# EAGLE board Project_v17a (EAGLE 5.06)
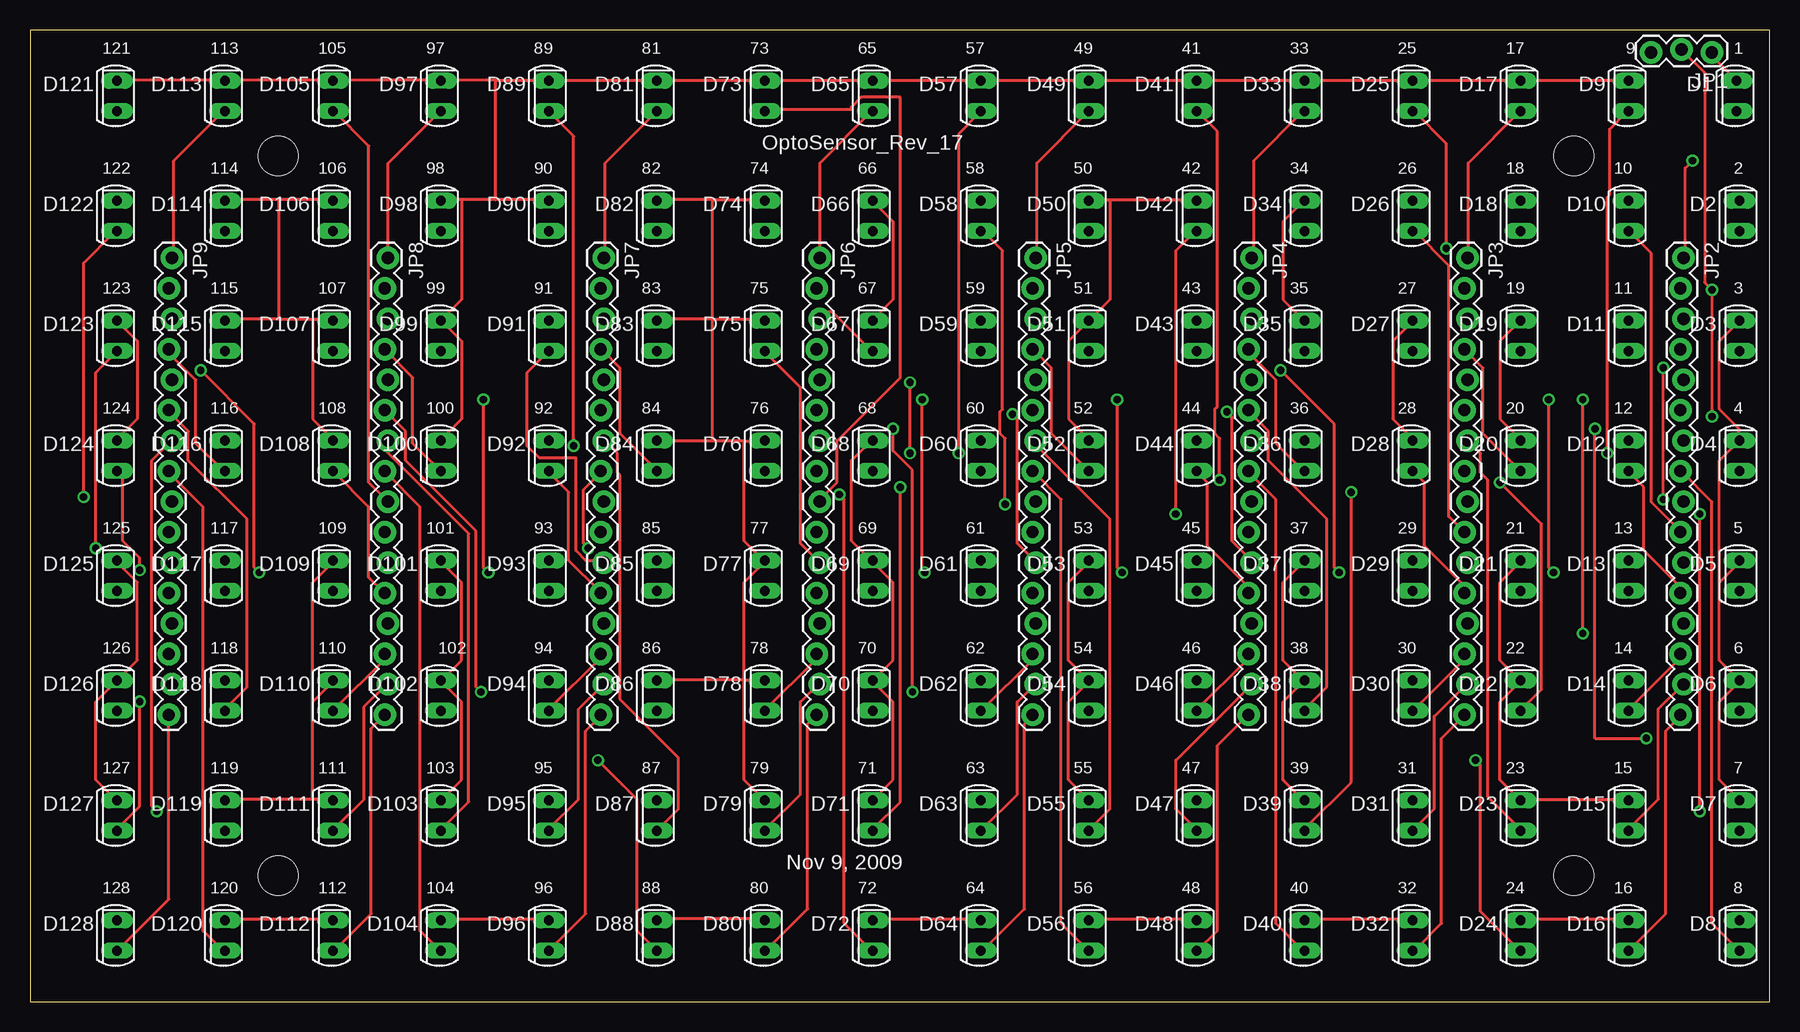
[diagram p0: board, top side]
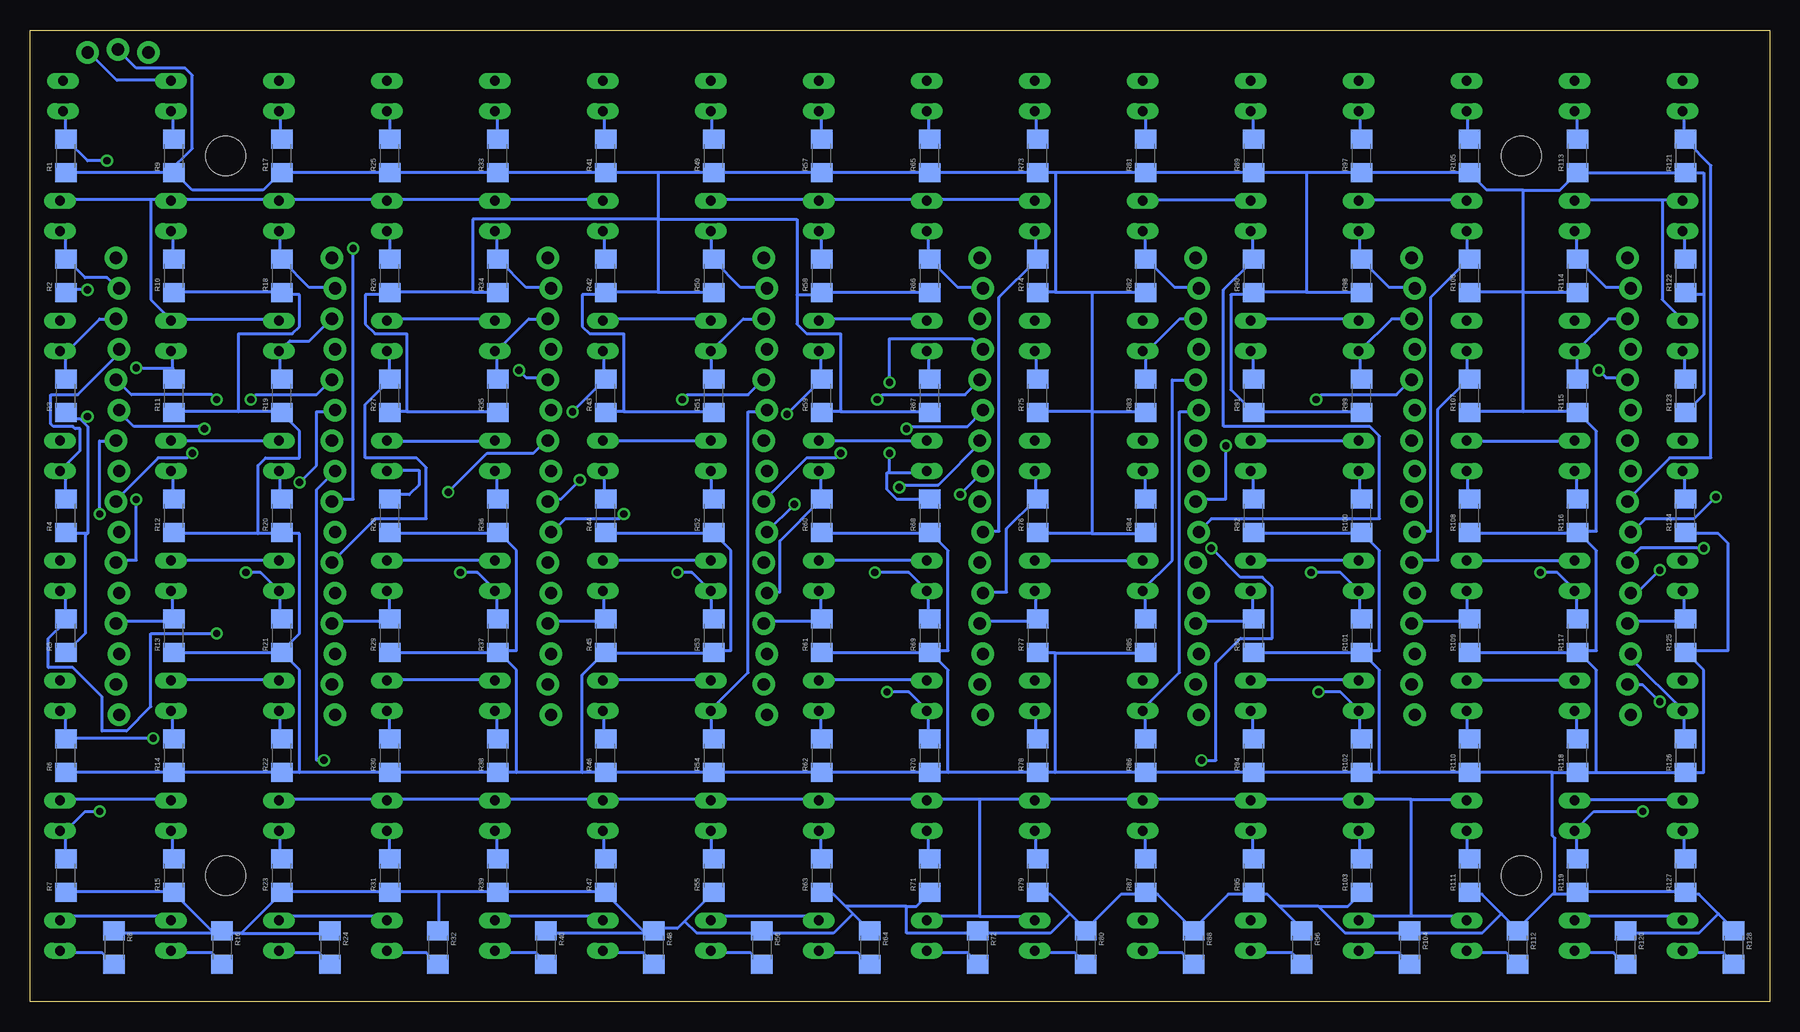
[diagram p1: board, bottom side, seen from below]

Size 145 x 81 mm. Coordinates in mm from the lower left corner, seen from the top.
Outline: 0,0 145,0 145,81 0,81 0,0
Copper layers (1*16): Top 0.035mm / dielectric 1.5mm / Bottom 0.035mm
Design rules "default": minimum track width 10mil, minimum drill 24mil, track to track 8mil, track to pad 8mil, pad to pad 8mil, via to via 8mil, smd to smd 8mil, copper to edge 40mil, drill to drill 8mil, minimum pad ring 10mil, minimum via ring 8mil, stop-mask expansion 4mil, vias tented up to drill 0mil, thermal gap 10mil

## Footprints (pad centres in the part's own frame; a part is rotated, then mirrored left to right if it is on the bottom)
SFH225 = drill 0.813 long: A 0,1.27; K 0,-1.27
1X03_LOCK = drill 1.016 pad 1.88 round: 1 0,0.127; 2 2.54,-0.127; 3 5.08,0.127
1X16_LOCK = drill 1.016 pad 1.88 round: 1 0,0.127; 2 2.54,-0.127; 3 5.08,0.127; 4 7.62,-0.127; 5 10.16,0.127; 6 12.7,-0.127; 7 15.24,0.127; 8 17.78,-0.127; 9 20.32,0.127; 10 22.86,-0.127; 11 25.4,0.127; 12 27.94,-0.127; 13 30.48,0.127; 14 33.02,-0.127; 15 35.56,0.127; 16 38.1,-0.127
STAND-OFF = hole 3.302: 0,0
1206 = smd 1.6 x 1.8: 1 -1.4,0; 2 1.4,0

## Placement (x,y rotation side)
D1  SFH225  [SFH225]  142.25,75.5 180 top
D2  SFH225  [SFH225]  142.5,65.5 180 top
D3  SFH225  [SFH225]  142.5,55.5 180 top
D4  SFH225  [SFH225]  142.5,45.5 180 top
D5  SFH225  [SFH225]  142.5,35.5 180 top
D6  SFH225  [SFH225]  142.5,25.5 180 top
D7  SFH225  [SFH225]  142.5,15.5 180 top
D8  SFH225  [SFH225]  142.5,5.5 180 top
D9  SFH225  [SFH225]  133.25,75.5 180 top
D10  SFH225  [SFH225]  133.25,65.5 180 top
D11  SFH225  [SFH225]  133.25,55.5 180 top
D12  SFH225  [SFH225]  133.25,45.5 180 top
D13  SFH225  [SFH225]  133.25,35.5 180 top
D14  SFH225  [SFH225]  133.25,25.5 180 top
D15  SFH225  [SFH225]  133.25,15.5 180 top
D16  SFH225  [SFH225]  133.25,5.5 180 top
D17  SFH225  [SFH225]  124.25,75.5 180 top
D18  SFH225  [SFH225]  124.25,65.5 180 top
D19  SFH225  [SFH225]  124.25,55.5 180 top
D20  SFH225  [SFH225]  124.25,45.5 180 top
D21  SFH225  [SFH225]  124.25,35.5 180 top
D22  SFH225  [SFH225]  124.25,25.5 180 top
D23  SFH225  [SFH225]  124.25,15.5 180 top
D24  SFH225  [SFH225]  124.25,5.5 180 top
D25  SFH225  [SFH225]  115.25,75.5 180 top
D26  SFH225  [SFH225]  115.25,65.5 180 top
D27  SFH225  [SFH225]  115.25,55.5 180 top
D28  SFH225  [SFH225]  115.25,45.5 180 top
D29  SFH225  [SFH225]  115.25,35.5 180 top
D30  SFH225  [SFH225]  115.25,25.5 180 top
D31  SFH225  [SFH225]  115.25,15.5 180 top
D32  SFH225  [SFH225]  115.25,5.5 180 top
D33  SFH225  [SFH225]  106.25,75.5 180 top
D34  SFH225  [SFH225]  106.25,65.5 180 top
D35  SFH225  [SFH225]  106.25,55.5 180 top
D36  SFH225  [SFH225]  106.25,45.5 180 top
D37  SFH225  [SFH225]  106.25,35.5 180 top
D38  SFH225  [SFH225]  106.25,25.5 180 top
D39  SFH225  [SFH225]  106.25,15.5 180 top
D40  SFH225  [SFH225]  106.25,5.5 180 top
D41  SFH225  [SFH225]  97.25,75.5 180 top
D42  SFH225  [SFH225]  97.25,65.5 180 top
D43  SFH225  [SFH225]  97.25,55.5 180 top
D44  SFH225  [SFH225]  97.25,45.5 180 top
D45  SFH225  [SFH225]  97.25,35.5 180 top
D46  SFH225  [SFH225]  97.25,25.5 180 top
D47  SFH225  [SFH225]  97.25,15.5 180 top
D48  SFH225  [SFH225]  97.25,5.5 180 top
D49  SFH225  [SFH225]  88.25,75.5 180 top
D50  SFH225  [SFH225]  88.25,65.5 180 top
D51  SFH225  [SFH225]  88.25,55.5 180 top
D52  SFH225  [SFH225]  88.25,45.5 180 top
D53  SFH225  [SFH225]  88.25,35.5 180 top
D54  SFH225  [SFH225]  88.25,25.5 180 top
D55  SFH225  [SFH225]  88.25,15.5 180 top
D56  SFH225  [SFH225]  88.25,5.5 180 top
D57  SFH225  [SFH225]  79.25,75.5 180 top
D58  SFH225  [SFH225]  79.25,65.5 180 top
D59  SFH225  [SFH225]  79.25,55.5 180 top
D60  SFH225  [SFH225]  79.25,45.5 180 top
D61  SFH225  [SFH225]  79.25,35.5 180 top
D62  SFH225  [SFH225]  79.25,25.5 180 top
D63  SFH225  [SFH225]  79.25,15.5 180 top
D64  SFH225  [SFH225]  79.25,5.5 180 top
D65  SFH225  [SFH225]  70.25,75.5 180 top
D66  SFH225  [SFH225]  70.25,65.5 180 top
D67  SFH225  [SFH225]  70.25,55.5 180 top
D68  SFH225  [SFH225]  70.25,45.5 180 top
D69  SFH225  [SFH225]  70.25,35.5 180 top
D70  SFH225  [SFH225]  70.25,25.5 180 top
D71  SFH225  [SFH225]  70.25,15.5 180 top
D72  SFH225  [SFH225]  70.25,5.5 180 top
D73  SFH225  [SFH225]  61.25,75.5 180 top
D74  SFH225  [SFH225]  61.25,65.5 180 top
D75  SFH225  [SFH225]  61.25,55.5 180 top
D76  SFH225  [SFH225]  61.25,45.5 180 top
D77  SFH225  [SFH225]  61.25,35.5 180 top
D78  SFH225  [SFH225]  61.25,25.5 180 top
D79  SFH225  [SFH225]  61.25,15.5 180 top
D80  SFH225  [SFH225]  61.25,5.5 180 top
D81  SFH225  [SFH225]  52.25,75.5 180 top
D82  SFH225  [SFH225]  52.25,65.5 180 top
D83  SFH225  [SFH225]  52.25,55.5 180 top
D84  SFH225  [SFH225]  52.25,45.5 180 top
D85  SFH225  [SFH225]  52.25,35.5 180 top
D86  SFH225  [SFH225]  52.25,25.5 180 top
D87  SFH225  [SFH225]  52.25,15.5 180 top
D88  SFH225  [SFH225]  52.25,5.5 180 top
D89  SFH225  [SFH225]  43.25,75.5 180 top
D90  SFH225  [SFH225]  43.25,65.5 180 top
D91  SFH225  [SFH225]  43.25,55.5 180 top
D92  SFH225  [SFH225]  43.25,45.5 180 top
D93  SFH225  [SFH225]  43.25,35.5 180 top
D94  SFH225  [SFH225]  43.25,25.5 180 top
D95  SFH225  [SFH225]  43.25,15.5 180 top
D96  SFH225  [SFH225]  43.25,5.5 180 top
D97  SFH225  [SFH225]  34.25,75.5 180 top
D98  SFH225  [SFH225]  34.25,65.5 180 top
D99  SFH225  [SFH225]  34.25,55.5 180 top
D100  SFH225  [SFH225]  34.25,45.5 180 top
D101  SFH225  [SFH225]  34.25,35.5 180 top
D102  SFH225  [SFH225]  34.25,25.5 180 top
D103  SFH225  [SFH225]  34.25,15.5 180 top
D104  SFH225  [SFH225]  34.25,5.5 180 top
D105  SFH225  [SFH225]  25.25,75.5 180 top
D106  SFH225  [SFH225]  25.25,65.5 180 top
D107  SFH225  [SFH225]  25.25,55.5 180 top
D108  SFH225  [SFH225]  25.25,45.5 180 top
D109  SFH225  [SFH225]  25.25,35.5 180 top
D110  SFH225  [SFH225]  25.25,25.5 180 top
D111  SFH225  [SFH225]  25.25,15.5 180 top
D112  SFH225  [SFH225]  25.25,5.5 180 top
D113  SFH225  [SFH225]  16.25,75.5 180 top
D114  SFH225  [SFH225]  16.25,65.5 180 top
D115  SFH225  [SFH225]  16.25,55.5 180 top
D116  SFH225  [SFH225]  16.25,45.5 180 top
D117  SFH225  [SFH225]  16.25,35.5 180 top
D118  SFH225  [SFH225]  16.25,25.5 180 top
D119  SFH225  [SFH225]  16.25,15.5 180 top
D120  SFH225  [SFH225]  16.25,5.5 180 top
D121  SFH225  [SFH225]  7.25,75.5 180 top
D122  SFH225  [SFH225]  7.25,65.5 180 top
D123  SFH225  [SFH225]  7.25,55.5 180 top
D124  SFH225  [SFH225]  7.25,45.5 180 top
D125  SFH225  [SFH225]  7.25,35.5 180 top
D126  SFH225  [SFH225]  7.25,25.5 180 top
D127  SFH225  [SFH225]  7.25,15.5 180 top
D128  SFH225  [SFH225]  7.25,5.5 180 top
JP1  [1X03_LOCK]  140.2,79.25 180 top
JP2  M16LOCK  [1X16_LOCK]  137.7,62 270 top
JP3  M16LOCK  [1X16_LOCK]  119.7,62 270 top
JP4  M16LOCK  [1X16_LOCK]  101.7,62 270 top
JP5  M16LOCK  [1X16_LOCK]  83.7,62 270 top
JP6  M16LOCK  [1X16_LOCK]  65.7,62 270 top
JP7  M16LOCK  [1X16_LOCK]  47.7,62 270 top
JP8  M16LOCK  [1X16_LOCK]  29.7,62 270 top
JP9  M16LOCK  [1X16_LOCK]  11.7,62 270 top
JP10  STAND-OFF  [STAND-OFF]  20.7,10.5 0 top
JP11  STAND-OFF  [STAND-OFF]  20.7,70.5 0 top
JP12  STAND-OFF  [STAND-OFF]  128.7,10.5 0 top
JP13  STAND-OFF  [STAND-OFF]  128.7,70.5 0 top
R1  10k  [1206]  142,70.5 90 bottom
R2  10k  [1206]  142,60.5 90 bottom
R3  10k  [1206]  142,50.5 90 bottom
R4  10k  [1206]  142,40.5 90 bottom
R5  10k  [1206]  142,30.5 90 bottom
R6  10k  [1206]  142,20.5 90 bottom
R7  10k  [1206]  142,10.5 90 bottom
R8  10k  [1206]  138,4.5 270 bottom
R9  10k  [1206]  133,70.5 90 bottom
R10  10k  [1206]  133,60.5 90 bottom
R11  10k  [1206]  133,50.5 90 bottom
R12  10k  [1206]  133,40.5 90 bottom
R13  10k  [1206]  133,30.5 90 bottom
R14  10k  [1206]  133,20.5 90 bottom
R15  10k  [1206]  133,10.5 90 bottom
R16  10k  [1206]  129,4.5 270 bottom
R17  10k  [1206]  124,70.5 90 bottom
R18  10k  [1206]  124,60.5 90 bottom
R19  10k  [1206]  124,50.5 90 bottom
R20  10k  [1206]  124,40.5 90 bottom
R21  10k  [1206]  124,30.5 90 bottom
R22  10k  [1206]  124,20.5 90 bottom
R23  10k  [1206]  124,10.5 90 bottom
R24  10k  [1206]  120,4.5 270 bottom
R25  10k  [1206]  115,70.5 90 bottom
R26  10k  [1206]  115,60.5 90 bottom
R27  10k  [1206]  115,50.5 90 bottom
R28  10k  [1206]  115,40.5 90 bottom
R29  10k  [1206]  115,30.5 90 bottom
R30  10k  [1206]  115,20.5 90 bottom
R31  10k  [1206]  115,10.5 90 bottom
R32  10k  [1206]  111,4.5 270 bottom
R33  10k  [1206]  106,70.5 90 bottom
R34  10k  [1206]  106,60.5 90 bottom
R35  10k  [1206]  106,50.5 90 bottom
R36  10k  [1206]  106,40.5 90 bottom
R37  10k  [1206]  106,30.5 90 bottom
R38  10k  [1206]  106,20.5 90 bottom
R39  10k  [1206]  106,10.5 90 bottom
R40  10k  [1206]  102,4.5 270 bottom
R41  10k  [1206]  97,70.5 90 bottom
R42  10k  [1206]  97,60.5 90 bottom
R43  10k  [1206]  97,50.5 90 bottom
R44  10k  [1206]  97,40.5 90 bottom
R45  10k  [1206]  97,30.5 90 bottom
R46  10k  [1206]  97,20.5 90 bottom
R47  10k  [1206]  97,10.5 90 bottom
R48  10k  [1206]  93,4.5 270 bottom
R49  10k  [1206]  88,70.5 90 bottom
R50  10k  [1206]  88,60.5 90 bottom
R51  10k  [1206]  88,50.5 90 bottom
R52  10k  [1206]  88,40.5 90 bottom
R53  10k  [1206]  88,30.5 90 bottom
R54  10k  [1206]  88,20.5 90 bottom
R55  10k  [1206]  88,10.5 90 bottom
R56  10k  [1206]  84,4.5 270 bottom
R57  10k  [1206]  79,70.5 90 bottom
R58  10k  [1206]  79,60.5 90 bottom
R59  10k  [1206]  79,50.5 90 bottom
R60  10k  [1206]  79,40.5 90 bottom
R61  10k  [1206]  79,30.5 90 bottom
R62  10k  [1206]  79,20.5 90 bottom
R63  10k  [1206]  79,10.5 90 bottom
R64  10k  [1206]  75,4.5 270 bottom
R65  10k  [1206]  70,70.5 90 bottom
R66  10k  [1206]  70,60.5 90 bottom
R67  10k  [1206]  70,50.5 90 bottom
R68  10k  [1206]  70,40.5 90 bottom
R69  10k  [1206]  70,30.5 90 bottom
R70  10k  [1206]  70,20.5 90 bottom
R71  10k  [1206]  70,10.5 90 bottom
R72  10k  [1206]  66,4.5 270 bottom
R73  10k  [1206]  61,70.5 90 bottom
R74  10k  [1206]  61,60.5 90 bottom
R75  10k  [1206]  61,50.5 90 bottom
R76  10k  [1206]  61,40.5 90 bottom
R77  10k  [1206]  61,30.5 90 bottom
R78  10k  [1206]  61,20.5 90 bottom
R79  10k  [1206]  61,10.5 90 bottom
R80  10k  [1206]  57,4.5 270 bottom
R81  10k  [1206]  52,70.5 90 bottom
R82  10k  [1206]  52,60.5 90 bottom
R83  10k  [1206]  52,50.5 90 bottom
R84  10k  [1206]  52,40.5 90 bottom
R85  10k  [1206]  52,30.5 90 bottom
R86  10k  [1206]  52,20.5 90 bottom
R87  10k  [1206]  52,10.5 90 bottom
R88  10k  [1206]  48,4.5 270 bottom
R89  10k  [1206]  43,70.5 90 bottom
R90  10k  [1206]  43,60.5 90 bottom
R91  10k  [1206]  43,50.5 90 bottom
R92  10k  [1206]  43,40.5 90 bottom
R93  10k  [1206]  43,30.5 90 bottom
R94  10k  [1206]  43,20.5 90 bottom
R95  10k  [1206]  43,10.5 90 bottom
R96  10k  [1206]  39,4.5 270 bottom
R97  10k  [1206]  34,70.5 90 bottom
R98  10k  [1206]  34,60.5 90 bottom
R99  10k  [1206]  34,50.5 90 bottom
R100  10k  [1206]  34,40.5 90 bottom
R101  10k  [1206]  34,30.5 90 bottom
R102  10k  [1206]  34,20.5 90 bottom
R103  10k  [1206]  34,10.5 90 bottom
R104  10k  [1206]  30,4.5 270 bottom
R105  10k  [1206]  25,70.5 90 bottom
R106  10k  [1206]  25,60.5 90 bottom
R107  10k  [1206]  25,50.5 90 bottom
R108  10k  [1206]  25,40.5 90 bottom
R109  10k  [1206]  25,30.5 90 bottom
R110  10k  [1206]  25,20.5 90 bottom
R111  10k  [1206]  25,10.5 90 bottom
R112  10k  [1206]  21,4.5 270 bottom
R113  10k  [1206]  16,70.5 90 bottom
R114  10k  [1206]  16,60.5 90 bottom
R115  10k  [1206]  16,50.5 90 bottom
R116  10k  [1206]  16,40.5 90 bottom
R117  10k  [1206]  16,30.5 90 bottom
R118  10k  [1206]  16,20.5 90 bottom
R119  10k  [1206]  16,10.5 90 bottom
R120  10k  [1206]  12,4.5 270 bottom
R121  10k  [1206]  7,70.5 90 bottom
R122  10k  [1206]  7,60.5 90 bottom
R123  10k  [1206]  7,50.5 90 bottom
R124  10k  [1206]  7,40.5 90 bottom
R125  10k  [1206]  7,30.5 90 bottom
R126  10k  [1206]  7,20.5 90 bottom
R127  10k  [1206]  7,10.5 90 bottom
R128  10k  [1206]  3,4.5 270 bottom

## Library data of the parts
D1-D128 = opto-trans-siemens
JP1-JP13 R1-R128 = SparkFun

## Nets
5V: D1.K D2.K D3.K D4.K D5.K D6.K D7.K D8.K D9.K D10.K D11.K D12.K D13.K D14.K D15.K D16.K D17.K D18.K D19.K D20.K D21.K D22.K D23.K D24.K D25.K D26.K D27.K D28.K D29.K D30.K D31.K D32.K D33.K D34.K D35.K D36.K D37.K D38.K D39.K D40.K D41.K D42.K D43.K D44.K D45.K D46.K D47.K D48.K D49.K D50.K D51.K D52.K D53.K D54.K D55.K D56.K D57.K D58.K D59.K D60.K D61.K D62.K D63.K D64.K D65.K D66.K D67.K D68.K D69.K D70.K D71.K D72.K D73.K D74.K D75.K D76.K D77.K D78.K D79.K D80.K D81.K D82.K D83.K D84.K D85.K D86.K D87.K D88.K D89.K D90.K D91.K D92.K D93.K D94.K D95.K D96.K D97.K D98.K D99.K D100.K D101.K D102.K D103.K D104.K D105.K D106.K D107.K D108.K D109.K D110.K D111.K D112.K D113.K D114.K D115.K D116.K D117.K D118.K D119.K D120.K D121.K D122.K D123.K D124.K D125.K D126.K D127.K D128.K JP1.1
GND: JP1.2 R1.1 R2.1 R3.1 R4.1 R5.1 R6.1 R7.1 R8.1 R9.1 R10.1 R11.1 R12.1 R13.1 R14.1 R15.1 R16.1 R17.1 R18.1 R19.1 R20.1 R21.1 R22.1 R23.1 R24.1 R25.1 R26.1 R27.1 R28.1 R29.1 R30.1 R31.1 R32.1 R33.1 R34.1 R35.1 R36.1 R37.1 R38.1 R39.1 R40.1 R41.1 R42.1 R43.1 R44.1 R45.1 R46.1 R47.1 R48.1 R49.1 R50.1 R51.1 R52.1 R53.1 R54.1 R55.1 R56.1 R57.1 R58.1 R59.1 R60.1 R61.1 R62.1 R63.1 R64.1 R65.1 R66.1 R67.1 R68.1 R69.1 R70.1 R71.1 R72.1 R73.1 R74.1 R75.1 R76.1 R77.1 R78.1 R79.1 R80.1 R81.1 R82.1 R83.1 R84.1 R85.1 R86.1 R87.1 R88.1 R89.1 R90.1 R91.1 R92.1 R93.1 R94.1 R95.1 R96.1 R97.1 R98.1 R99.1 R100.1 R101.1 R102.1 R103.1 R104.1 R105.1 R106.1 R107.1 R108.1 R109.1 R110.1 R111.1 R112.1 R113.1 R114.1 R115.1 R116.1 R117.1 R118.1 R119.1 R120.1 R121.1 R122.1 R123.1 R124.1 R125.1 R126.1 R127.1 R128.1
N$1: D1.A JP2.1 R1.2
N$2: D2.A JP2.2 R2.2
N$3: D3.A JP2.3 R3.2
N$4: D4.A JP2.4 R4.2
N$5: D5.A JP2.5 R5.2
N$6: D6.A JP2.6 R6.2
N$7: D7.A JP2.7 R7.2
N$8: D8.A JP2.8 R8.2
N$9: D9.A JP2.9 R9.2
N$10: D10.A JP2.10 R10.2
N$11: D11.A JP2.11 R11.2
N$12: D12.A JP2.12 R12.2
N$13: D13.A JP2.13 R13.2
N$14: D14.A JP2.14 R14.2
N$15: D15.A JP2.15 R15.2
N$16: D16.A JP2.16 R16.2
N$17: D17.A JP3.1 R17.2
N$18: D18.A JP3.2 R18.2
N$19: D19.A JP3.3 R19.2
N$20: D20.A JP3.4 R20.2
N$21: D21.A JP3.5 R21.2
N$22: D22.A JP3.6 R22.2
N$23: D23.A JP3.7 R23.2
N$24: D24.A JP3.8 R24.2
N$25: D25.A JP3.9 R25.2
N$26: D26.A JP3.10 R26.2
N$27: D27.A JP3.11 R27.2
N$28: D28.A JP3.12 R28.2
N$29: D29.A JP3.13 R29.2
N$30: D30.A JP3.14 R30.2
N$31: D31.A JP3.15 R31.2
N$32: D32.A JP3.16 R32.2
N$33: D33.A JP4.1 R33.2
N$34: D34.A JP4.2 R34.2
N$35: D35.A JP4.3 R35.2
N$36: D36.A JP4.4 R36.2
N$37: D37.A JP4.5 R37.2
N$38: D38.A JP4.6 R38.2
N$39: D39.A JP4.7 R39.2
N$40: D40.A JP4.8 R40.2
N$41: D41.A JP4.9 R41.2
N$42: D42.A JP4.10 R42.2
N$43: D43.A JP4.11 R43.2
N$44: D44.A JP4.12 R44.2
N$45: D45.A JP4.13 R45.2
N$46: D46.A JP4.14 R46.2
N$47: D47.A JP4.15 R47.2
N$48: D48.A JP4.16 R48.2
N$49: D49.A JP5.1 R49.2
N$50: D50.A JP5.2 R50.2
N$51: D51.A JP5.3 R51.2
N$52: D52.A JP5.4 R52.2
N$53: D53.A JP5.5 R53.2
N$54: D54.A JP5.6 R54.2
N$55: D55.A JP5.7 R55.2
N$56: D56.A JP5.8 R56.2
N$57: D57.A JP5.9 R57.2
N$58: D58.A JP5.10 R58.2
N$59: D59.A JP5.11 R59.2
N$60: D60.A JP5.12 R60.2
N$61: D61.A JP5.13 R61.2
N$62: D62.A JP5.14 R62.2
N$63: D63.A JP5.15 R63.2
N$64: D64.A JP5.16 R64.2
N$65: D65.A JP6.1 R65.2
N$66: D66.A JP6.2 R66.2
N$67: D67.A JP6.3 R67.2
N$68: D68.A JP6.4 R68.2
N$69: D69.A JP6.5 R69.2
N$70: D70.A JP6.6 R70.2
N$71: D71.A JP6.7 R71.2
N$72: D72.A JP6.8 R72.2
N$73: D73.A JP6.9 R73.2
N$74: D74.A JP6.10 R74.2
N$75: D75.A JP6.11 R75.2
N$76: D76.A JP6.12 R76.2
N$77: D77.A JP6.13 R77.2
N$78: D78.A JP6.14 R78.2
N$79: D79.A JP6.15 R79.2
N$80: D80.A JP6.16 R80.2
N$81: D81.A JP7.1 R81.2
N$82: D82.A JP7.2 R82.2
N$83: D83.A JP7.3 R83.2
N$84: D84.A JP7.4 R84.2
N$85: D85.A JP7.5 R85.2
N$86: D86.A JP7.6 R86.2
N$87: D87.A JP7.7 R87.2
N$88: D88.A JP7.8 R88.2
N$89: D89.A JP7.9 R89.2
N$90: D90.A JP7.10 R90.2
N$91: D91.A JP7.11 R91.2
N$92: D92.A JP7.12 R92.2
N$93: D93.A JP7.13 R93.2
N$94: D94.A JP7.14 R94.2
N$95: D95.A JP7.15 R95.2
N$96: D96.A JP7.16 R96.2
N$97: D97.A JP8.1 R97.2
N$98: D98.A JP8.2 R98.2
N$99: D99.A JP8.3 R99.2
N$100: D100.A JP8.4 R100.2
N$101: D101.A JP8.5 R101.2
N$102: D102.A JP8.6 R102.2
N$103: D103.A JP8.7 R103.2
N$104: D104.A JP8.8 R104.2
N$105: D105.A JP8.9 R105.2
N$106: D106.A JP8.10 R106.2
N$107: D107.A JP8.11 R107.2
N$108: D108.A JP8.12 R108.2
N$109: D109.A JP8.13 R109.2
N$110: D110.A JP8.14 R110.2
N$111: D111.A JP8.15 R111.2
N$112: D112.A JP8.16 R112.2
N$113: D113.A JP9.1 R113.2
N$114: D114.A JP9.2 R114.2
N$115: D115.A JP9.3 R115.2
N$116: D116.A JP9.4 R116.2
N$117: D117.A JP9.5 R117.2
N$118: D118.A JP9.6 R118.2
N$119: D119.A JP9.7 R119.2
N$120: D120.A JP9.8 R120.2
N$121: D121.A JP9.9 R121.2
N$122: D122.A JP9.10 R122.2
N$123: D123.A JP9.11 R123.2
N$124: D124.A JP9.12 R124.2
N$125: D125.A JP9.13 R125.2
N$126: D126.A JP9.14 R126.2
N$127: D127.A JP9.15 R127.2
N$128: D128.A JP9.16 R128.2

## Tracks (layer width: path | path; a pad name or v marks a point on that pad's centre or on a via)
5V
  Top 0.254: D24.K 124.36,6.91 133.1,6.91 D16.K | D40.K 106.27,6.91 115.21,6.91 D32.K | D56.K 88.39,6.91 97.13,6.91 D48.K | D88.K 52.43,6.91 61.16,6.91 D80.K | D72.K 70.31,6.91 79.25,6.91 D64.K | 140.82,34.95 140.82,28.45 142.44,26.82 D6.K 142.44,26.62 140.82,24.99 140.82,18.49 142.44,16.87 D7.K | 140.82,34.95 142.44,36.58 D5.K | 140.82,34.95 140.82,45.11 142.44,46.74 D4.K 142.44,46.94 142.44,47.75 140.82,49.38 140.82,55.07 142.44,56.69 D3.K | D21.K 124.16,36.58 122.53,34.95 122.53,28.45 124.16,26.82 D22.K 124.16,26.62 122.53,24.99 122.53,18.49 124.16,16.87 D23.K 124.36,16.87 133.1,16.87 D15.K | D104.K 34.34,6.91 43.08,6.91 D96.K | D112.K 25.2,6.91 16.26,6.91 D120.K | D101.K 34.34,36.58 35.97,34.95 35.97,28.45 34.34,26.82 D102.K 34.34,26.62 35.97,24.99 35.97,18.49 34.34,16.87 D103.K | D125.K 7.32,36.58 8.94,34.95 8.94,28.45 7.32,26.82 D126.K 7.11,26.62 5.49,24.99 5.49,18.49 7.11,16.87 D127.K | 23.57,16.87 25.2,16.87 D111.K | 23.57,16.87 16.26,16.87 D119.K | 23.57,24.99 25.2,26.62 D110.K | 23.57,16.87 23.57,24.99 | 23.57,24.99 23.57,34.95 25.2,36.58 D109.K | D68.K 70.1,46.74 68.48,45.11 68.48,38.41 70.1,36.78 D69.K 70.31,36.58 71.93,34.95 71.93,28.45 70.31,26.82 D70.K 70.31,26.62 71.93,24.99 71.93,18.49 70.31,16.87 D71.K | D37.K 106.07,36.58 104.44,34.95 104.44,28.45 106.07,26.82 D38.K 106.07,26.62 104.44,24.99 104.44,18.49 106.07,16.87 D39.K | D53.K 88.19,36.58 86.56,34.95 86.56,28.45 88.19,26.82 D54.K 88.19,26.62 86.56,24.99 86.56,18.49 88.19,16.87 D55.K | D121.K 7.32,76.81 16.05,76.81 D113.K 16.26,76.81 25.2,76.81 D105.K 25.4,76.81 34.14,76.81 D97.K 34.34,76.81 38.81,76.81
  Top 0.254: 38.81,76.81 43.08,76.81 D89.K 43.28,76.81 52.22,76.81 D81.K 52.43,76.81 61.16,76.81 D73.K 61.37,76.81 70.1,76.81 D65.K 70.31,76.81 79.25,76.81 D57.K 79.45,76.81 88.19,76.81 D49.K 88.39,76.81 97.13,76.81 D41.K 97.33,76.81 106.07,76.81 D33.K 106.27,76.81 115.21,76.81 D25.K 115.42,76.81 124.16,76.81 D17.K 124.36,76.81 133.1,76.81 D9.K | D1.K 142.24,76.81 140.21,78.84 140.21,79.05 JP1.1 | D100.K 34.34,46.94 35.97,48.56 35.97,55.07 34.34,56.69 D99.K 34.34,56.9 35.97,58.52 35.97,66.85 | 23.57,56.9 25.2,56.9 D107.K | 20.73,56.9 23.57,56.9 | 20.73,56.9 16.26,56.9 D115.K | 23.57,56.9 23.57,48.56 25.2,46.94 D108.K | D124.K 7.32,46.94 8.94,48.56 8.94,55.07 7.32,56.69 D123.K | 35.97,66.85 34.34,66.85 D98.K | 38.81,66.85 35.97,66.85 | 38.81,66.85 43.08,66.85 D90.K | 20.73,66.85 25.2,66.85 D106.K | 20.73,66.85 16.26,66.85 D114.K | 20.73,66.85 20.73,56.9 | D20.K 124.16,46.94 122.53,48.56 122.53,55.07 124.16,56.69 D19.K | 59.54,26.82 61.16,26.82 D78.K | 59.54,26.82 52.43,26.82 D86.K | 59.54,26.82 59.54,34.95 61.16,36.58 D77.K 61.16,36.78 59.54,38.41 59.54,46.74 | 59.54,46.74 61.16,46.74 D76.K | 59.54,46.74 56.9,46.74 | 56.9,46.74 52.43,46.74 D84.K | 56.9,56.9 61.16,56.9 D75.K | 56.9,56.9 52.43,56.9 D83.K | 56.9,46.74 56.9,56.9 | 56.9,66.85 61.16,66.85 D74.K | 56.9,66.85 52.43,66.85 D82.K | D67.K 70.31,56.9 71.93,58.52 71.93,65.02 70.31,66.65 D66.K | D28.K 115.21,46.94 113.59,48.56 113.59,55.07 115.21,56.69 D27.K | D52.K 88.19,46.94 86.56,48.56 86.56,55.07 88.19,56.69 D51.K 88.39,56.9 90.02,58.52 90.02,66.85 | 90.02,66.85 97.13,66.85 D42.K | 90.02,66.85 88.39,66.85 D50.K | D35.K 106.07,56.9 104.44,58.52 104.44,65.02 106.07,66.65 D34.K
  Top 0.254: 56.9,56.9 56.9,66.85 | 38.81,66.85 38.81,76.81 | 59.54,26.82 59.54,18.49 61.16,16.87 D79.K
  Bottom 0.254: D8.K 142.44,6.91 142.24,7.11 133.5,7.11 133.3,6.91 D16.K | 65.84,7.11 69.9,7.11 70.1,6.91 D72.K | 65.84,7.11 61.57,7.11 61.37,6.91 D80.K | D56.K 88.19,6.91 87.99,7.11 79.65,7.11 79.45,6.91 D64.K | D40.K 106.07,6.91 105.87,7.11 97.54,7.11 97.33,6.91 D48.K | D24.K 124.16,6.91 123.95,7.11 115.62,7.11 115.42,6.91 D32.K | D22.K 124.36,26.82 133.1,26.82 D14.K | D21.K 124.36,36.78 133.1,36.78 D13.K | D23.K 124.16,16.87 115.42,16.87 D31.K 115.21,16.87 106.27,16.87 D39.K 106.07,16.87 97.33,16.87 D47.K 97.13,16.87 88.39,16.87 D55.K 88.19,16.87 79.45,16.87 D63.K 79.25,16.87 70.31,16.87 D71.K 70.1,16.87 65.84,16.87 | D7.K 142.44,16.87 133.3,16.87 D15.K | D128.K 7.32,6.91 7.52,7.11 15.85,7.11 16.05,6.91 D120.K | 29.87,7.11 25.6,7.11 25.4,6.91 D112.K | 29.87,7.11 33.93,7.11 34.14,6.91 D104.K | D102.K 34.34,26.82 43.08,26.82 D94.K | D101.K 34.34,36.78 43.08,36.78 D93.K | D117.K 25.2,36.78 D109.K | D118.K 16.26,26.82 25.2,26.82 D110.K | D127.K 7.32,16.87 16.05,16.87 D119.K | 29.87,16.87 34.14,16.87 D103.K 34.34,16.87 43.08,16.87 D95.K 43.28,16.87 52.22,16.87 D87.K 52.43,16.87 61.16,16.87 D79.K 61.37,16.87 65.84,16.87 | 29.87,16.87 25.4,16.87 D111.K | 29.87,7.11 29.87,16.87 | D68.K 70.31,46.74 79.25,46.74 D60.K | D70.K 70.31,26.82 79.25,26.82 D62.K | D69.K 70.31,36.78 D61.K | D38.K 106.27,26.82 115.21,26.82 D30.K | D37.K 106.27,36.78 115.21,36.78 D29.K | D54.K 88.39,26.82 97.13,26.82 D46.K | D53.K 88.39,36.78 97.13,36.78 D45.K | 65.84,16.87 65.84,7.11 | JP1.1 140,79.05 137.77,76.81 133.3,76.81 D9.K | D100.K 34.34,46.74 43.08,46.74 D92.K | D99.K 34.34,56.9 43.08,56.9 D91.K | D116.K 16.26,46.74 25.2,46.74 D108.K
  Bottom 0.254: 8.94,66.85 16.05,66.85 D114.K | 8.94,66.85 7.32,66.85 D122.K | D106.K 25.4,66.85 34.14,66.85 D98.K | 8.94,66.85 8.94,58.52 7.32,56.9 D123.K | D20.K 124.36,46.74 133.1,46.74 D12.K | D19.K 124.36,56.9 133.1,56.9 D11.K 133.3,56.9 134.93,58.52 134.93,66.85 | 134.93,66.85 133.3,66.85 D10.K 133.1,66.85 124.36,66.85 D18.K 124.16,66.85 115.42,66.85 D26.K 115.21,66.85 106.27,66.85 D34.K 106.07,66.85 97.33,66.85 D42.K | 134.93,66.85 142.44,66.85 D2.K | D85.K 52.43,36.78 61.16,36.78 D77.K | D67.K 70.31,56.9 79.25,56.9 D59.K | D74.K 61.37,66.85 70.1,66.85 D66.K 70.31,66.85 79.25,66.85 D58.K 79.45,66.85 88.19,66.85 D50.K | D36.K 106.27,46.74 115.21,46.74 D28.K | D35.K 106.27,56.9 115.21,56.9 D27.K | D52.K 88.39,46.74 97.13,46.74 D44.K | D51.K 88.39,56.9 97.13,56.9 D43.K | D90.K 43.28,66.85 52.22,66.85 D82.K
GND  (via drill 0.61)
  Top 0.254: JP1.2 137.77,79.25 139.6,77.42 139.6,59.94 v140.21,59.33 v140.21,48.77
  Bottom 0.254: R99.1 34.14,49.17 42.88,49.17 R91.1 43.08,49.17 44.91,51 44.91,58.93 43.08,58.93 R90.1 42.88,59.13 38.61,59.13 | 38.61,59.13 34.14,59.13 R98.1 | 20.52,49.17 24.99,49.17 R107.1 | 20.52,49.17 16.05,49.17 R115.1 15.85,48.97 14.43,47.55 14.43,39.22 15.85,39.22 R116.1 | 20.52,59.13 24.99,59.13 R106.1 | 20.52,59.13 16.05,59.13 R114.1 | 20.52,49.17 20.52,59.13 | 5.49,58.93 5.49,50.6 6.91,49.17 R123.1 | 5.49,58.93 6.91,58.93 R122.1 | 20.52,67.67 23.57,67.67 24.99,69.09 R105.1 25.2,69.09 33.93,69.09 R97.1 34.14,69.09 38.61,69.09 | 20.52,67.67 17.48,67.67 16.05,69.09 R113.1 15.85,69.09 7.11,69.09 R121.1 6.91,69.09 5.49,69.09 5.49,58.93 | 38.61,69.09 42.88,69.09 R89.1 43.08,69.09 51.82,69.09 R81.1 52.02,69.09 59.54,69.09 | 20.52,59.13 20.52,67.67 | 38.61,69.09 38.61,59.13 | 140.41,39.01 140.41,30.68 141.83,29.26 R5.1 | 140.41,39.01 141.83,39.01 R4.1 | 140.61,48.36 140.21,47.95 140.21,39.01 140.41,39.01 | 140.61,48.36 140.82,48.56 141.43,48.56 141.83,48.97 R3.1 | v140.21,59.33 141.63,59.33 141.83,59.13 R2.1 | v140.21,48.77 140.61,48.36 | 59.54,59.13 60.96,59.13 R74.1 | 59.54,59.13 56.49,59.13 | 56.49,59.13 52.02,59.13 R82.1 | 56.49,39.01 60.96,39.01 R76.1 | 56.49,39.01 52.02,39.01 R84.1 | 56.49,49.17 60.96,49.17 R75.1 | 56.49,49.17 52.02,49.17 R83.1 | 56.49,49.17 56.49,39.01 | 56.49,59.13 56.49,49.17 | 77.42,49.17 78.84,49.17 R59.1 | 77.42,49.17 70.1,49.17 R67.1 | R66.1 70.1,59.13 78.84,59.13 R58.1 79.05,58.93 81.08,58.93 | 77.42,49.17 77.42,55.68 80.26,55.68 81.08,56.49 81.08,58.93 | 113.59,49.17 114.81,49.17 R27.1 | 113.59,49.17 106.07,49.17 R35.1 | 108.1,59.13 114.81,59.13 R26.1 115.01,58.93 117.04,58.93 117.04,56.49 116.23,55.68 113.59,55.68 113.59,49.17
  Bottom 0.254: 108.1,59.13 106.07,59.13 R34.1 | 95.5,49.17 96.93,49.17 R43.1 | 95.5,49.17 88.19,49.17 R51.1 | 92.66,59.13 96.93,59.13 R42.1 97.13,58.93 98.96,58.93 98.96,56.29 98.35,55.68 95.5,55.68 95.5,49.17 | 92.66,59.13 88.19,59.13 R50.1 | 133.5,69.09 141.83,69.09 R1.1 | 133.5,69.09 133.1,69.09 R9.1 | 92.66,69.09 96.93,69.09 R41.1 97.13,69.09 105.87,69.09 R33.1 106.07,69.09 114.81,69.09 R25.1 115.01,69.09 123.95,69.09 R17.1 124.16,69.09 125.58,67.67 131.47,67.67 132.89,69.09 R9.1 | 92.66,69.09 88.19,69.09 R49.1 87.99,69.09 79.05,69.09 R57.1 78.84,69.09 70.1,69.09 R65.1 69.9,69.09 61.16,69.09 R73.1 60.96,69.09 59.54,69.09 | 92.66,69.09 92.66,65.23 | 92.66,65.23 92.66,59.13 | 108.1,59.13 108.1,65.23 92.66,65.23 | 81.08,58.93 81.08,65.23 92.66,65.23 | 59.54,69.09 59.54,59.13 | 133.5,69.09 131.47,71.12 131.47,77.22 132.08,77.83 136.14,77.83 137.57,79.25 JP1.2 | R9.1 133.5,69.09 | 127.41,5.69 128.63,5.69 | 127.41,5.69 120.29,5.69 120.09,5.89 R24.1 | 128.63,5.69 128.83,5.89 R16.1 | 127.41,5.69 124.16,8.94 R23.1 123.95,9.14 115.01,9.14 R31.1 114.81,9.14 110.95,9.14 | 128.63,5.69 129.64,5.69 | 129.64,5.69 137.77,5.69 137.97,5.89 R8.1 | 128.63,5.69 R16.1 | 129.64,5.69 132.89,8.94 R15.1 133.1,9.14 141.83,9.14 R7.1 | 129.64,5.69 R16.1 | 110.95,9.14 106.07,9.14 R39.1 105.87,9.14 97.13,9.14 R47.1 96.93,8.94 93.67,5.69 | 110.95,9.14 110.95,6.1 R32.1 | 90.42,6.71 91.03,6.1 92.86,6.1 R48.1 | 90.42,6.71 88.19,8.94 R55.1 | 93.67,5.69 93.27,5.69 93.07,5.89 R48.1 | 93.67,5.69 101.6,5.69 101.8,5.89 R40.1 | R48.1 93.67,5.69 | 22.35,7.32 23.98,8.94 24.99,8.94 R111.1 | 22.35,7.32 21.13,6.1 R112.1 20.93,6.1 18.09,8.94 17.88,8.94
  Bottom 0.254: 22.35,7.32 23.98,5.69 29.67,5.69 29.87,5.89 R104.1 30.07,5.89 30.28,5.69 35.36,5.69 37.59,7.92 | 4.27,7.32 5.89,8.94 6.91,8.94 R127.1 7.11,9.14 15.85,9.14 R119.1 16.05,8.94 17.88,8.94 | 4.27,7.32 3.05,6.1 R128.1 | 4.27,7.32 5.89,5.69 11.79,5.69 R120.1 | 77.01,7.92 78.03,8.94 78.84,8.94 R63.1 | 77.01,7.92 76.4,7.32 | 76.4,7.32 75.18,6.1 R64.1 | 71.93,7.92 77.01,7.92 | 71.93,7.92 71.12,7.92 70.1,8.94 R71.1 | 83.72,5.69 83.92,5.89 R56.1 83.72,5.69 | 83.72,5.69 78.03,5.69 76.4,7.32 | 58.32,7.32 59.94,8.94 60.96,8.94 R79.1 | 58.32,7.32 57.1,6.1 R80.1 56.9,6.1 54.05,8.94 52.02,8.94 R87.1 51.82,8.94 51,8.94 48.16,6.1 R88.1 47.95,6.1 45.11,8.94 43.08,8.94 R95.1 42.88,8.94 41.86,8.94 40.84,7.92 | 65.63,5.69 65.84,5.89 R72.1 65.63,5.69 | 65.63,5.69 59.94,5.69 58.32,7.32 | 40.84,7.92 39.01,6.1 R96.1 | 37.59,7.92 40.84,7.92 | 37.59,7.92 35.15,7.92 34.14,8.94 R103.1 | 71.93,7.92 71.93,5.69 65.63,5.69 | 90.42,6.71 89.41,5.69 83.72,5.69 | 127.61,49.17 132.89,49.17 R11.1 | 127.61,49.17 124.16,49.17 R19.1 123.95,48.97 122.53,47.55 122.53,45.31 125.37,45.31 125.98,44.7 125.98,39.01 | R10.1 132.89,59.13 124.16,59.13 R18.1 123.95,58.93 122.53,58.93 122.53,56.29 123.14,55.68 127.61,55.68 127.61,49.17 | R21.1 124.16,29.06 132.89,29.06 R13.1 | 125.98,39.01 132.89,39.01 R12.1 | 125.98,39.01 124.16,39.01 R20.1 123.95,39.01 122.53,39.01 122.53,30.68 123.95,29.26 R21.1 | R6.1 141.83,19.1 133.1,19.1 R14.1 132.89,19.1 124.16,19.1 R22.1 123.95,19.1 122.53,19.1 | R28.1 114.81,39.01 106.07,39.01 R36.1 105.87,39.01 104.44,37.59 104.44,29.26 105.87,29.26 R37.1 | R37.1 106.07,29.06 114.81,29.06 R29.1
  Bottom 0.254: R44.1 96.93,39.01 88.19,39.01 R52.1 87.99,39.01 86.56,37.59 86.56,29.26 87.99,29.26 R53.1 88.19,29.06 96.93,29.06 R45.1 97.13,29.06 98.96,27.23 98.96,19.1 | 104.44,19.1 105.87,19.1 R38.1 106.07,19.1 114.81,19.1 R30.1 122.53,19.1 | 98.96,19.1 104.44,19.1 | 98.96,19.1 97.13,19.1 R46.1 96.93,19.1 88.19,19.1 R54.1 87.99,19.1 79.05,19.1 R62.1 78.84,19.1 70.1,19.1 R70.1 69.9,19.1 68.48,19.1 | 104.44,19.1 104.44,27.64 105.87,29.06 R37.1 | 122.53,19.1 122.53,27.64 123.95,29.06 R21.1 | R60.1 78.84,39.01 70.1,39.01 R68.1 69.9,39.01 68.48,37.59 68.48,29.26 69.9,29.26 R69.1 | R69.1 70.1,29.06 78.84,29.06 R61.1 | 59.54,29.06 60.96,29.06 R77.1 | 59.54,29.06 52.02,29.06 R85.1 | 68.48,19.1 61.16,19.1 R78.1 60.96,19.1 59.54,19.1 | 59.54,19.1 59.54,29.06 | 68.48,19.1 68.48,27.64 69.9,29.06 R69.1 | R116.1 16.05,39.01 24.99,39.01 R108.1 | R117.1 16.05,29.06 24.99,29.06 R109.1 | 14.43,19.1 15.85,19.1 R118.1 16.05,19.1 18.09,19.1 | 14.43,19.1 7.11,19.1 R126.1 6.91,19.1 5.49,19.1 5.49,27.64 6.91,29.06 R125.1 6.91,29.26 3.45,29.26 3.45,38.2 4.27,39.01 6.91,39.01 R124.1 | 14.43,19.1 14.43,27.64 15.85,29.06 R117.1 | R116.1 15.85,39.01 14.43,37.59 14.43,29.26 15.85,29.26 R117.1 | R92.1 42.88,39.01 34.14,39.01 R100.1 33.93,39.01 32.51,37.59 32.51,29.26 33.93,29.26 R101.1 | R101.1 34.14,29.06 42.88,29.06 R93.1 | 32.51,19.1 33.93,19.1 R102.1 34.14,19.1 42.88,19.1 R94.1 43.08,19.1 51.82,19.1 R86.1 52.02,19.1 59.54,19.1 | 32.51,19.1 25.2,19.1 R110.1 18.09,19.1 | 32.51,19.1 32.51,27.64 33.93,29.06 R101.1 | 17.88,8.94 17.88,13.61 18.09,13.82 18.09,19.1
N$1  (via drill 0.61)
  Top 0.254: v138.58,70.1 137.97,69.49 137.97,62.18 JP2.1
  Bottom 0.254: D1.A 142.24,74.17 142.04,74.17 142.04,71.93 R1.2 141.83,71.73 140.21,70.1 v138.58,70.1
N$2
  Bottom 0.254: D2.A 142.44,64.21 142.04,64.21 142.04,61.98 R2.2 141.83,61.77 140.41,60.35 138.58,60.35 137.77,59.54 JP2.2
N$3
  Bottom 0.254: 142.04,54.05 142.04,52.02 R3.2 | 142.04,54.05 142.44,54.05 D3.A 142.04,54.05 | 142.04,54.05 139.19,56.9 137.97,56.9 JP2.3
N$4
  Bottom 0.254: R4.2 142.04,42.06 142.04,44.09 142.44,44.09 D4.A 142.44,44.3 140.82,45.92 140.82,47.75 141.22,47.75 141.43,47.95 143.05,47.95 143.26,48.16 143.26,50.6 141.02,50.6 137.77,53.85 137.77,54.25 JP2.4
N$5  (via drill 0.61)
  Top 0.254: v129.44,30.68 v129.44,50.19
  Bottom 0.254: D5.A 142.44,34.14 142.04,34.14 142.04,31.9 R5.2 142.04,31.7 143.46,30.28 143.46,27.84 141.43,27.84 138.99,25.4 138.99,22.55 136.96,22.55 134.93,24.59 134.93,30.68 v129.44,30.68 | v129.44,50.19 129.84,50.6 136.55,50.6 137.77,51.82 JP2.5
N$6  (via drill 0.61)
  Top 0.254: v134.72,21.95 130.45,21.95 v130.45,47.75
  Bottom 0.254: D6.A 142.44,24.18 142.04,24.18 142.04,21.95 R6.2 141.83,21.95 v134.72,21.95 | v130.45,47.75 130.66,47.95 136.35,47.95 137.57,49.17 JP2.6
N$7  (via drill 0.61)
  Top 0.254: v139.19,15.85 v139.19,40.64
  Bottom 0.254: 142.04,14.22 142.04,11.99 R7.2 | 142.04,14.22 142.44,14.22 D7.A 142.04,14.22 | 142.04,14.22 140.41,15.85 v139.19,15.85 | v139.19,40.64 139.19,46.74 137.97,46.74 JP2.7
N$8
  Top 0.254: JP2.8 137.77,44.09 140.21,41.66 140.21,6.5 142.44,4.27 D8.A
  Bottom 0.254: R8.2 138.18,3.25 138.99,4.06 142.44,4.06 D8.A
N$9  (via drill 0.61)
  Top 0.254: v131.47,45.72 131.47,67.06 131.67,67.26 131.67,72.75 133.1,74.17 D9.A
  Bottom 0.254: R9.2 133.1,71.93 133.1,74.17 D9.A | v131.47,45.72 131.88,45.31 134.31,45.31 137.77,41.86 JP2.9
N$10
  Top 0.254: D10.A 133.3,64.21 135.13,62.38 135.13,41.66 137.57,39.22 JP2.10
  Bottom 0.254: R10.2 133.1,61.98 133.1,64.21 D10.A
N$11  (via drill 0.61)
  Top 0.254: v136.14,41.86 v136.14,52.83
  Bottom 0.254: 133.1,52.83 133.1,54.05 D11.A | 133.1,52.83 133.1,52.02 R11.2 | v136.14,52.83 133.1,52.83 | v136.14,41.86 136.14,36.78 137.77,36.78 JP2.11
N$12
  Top 0.254: D12.A 133.3,44.09 134.52,42.88 134.52,37.59 137.57,34.54 137.57,34.14 JP2.12
  Bottom 0.254: R12.2 133.1,42.06 133.1,44.09 D12.A
N$13
  Bottom 0.254: D13.A 133.1,34.14 133.1,31.9 R13.2 133.1,31.7 137.77,31.7 JP2.13
N$14
  Top 0.254: D14.A 133.3,24.38 137.57,28.65 137.57,28.85 JP2.14
  Bottom 0.254: R14.2 133.1,21.95 133.1,24.18 D14.A
N$15
  Top 0.254: D15.A 133.3,14.43 135.74,16.87 135.74,24.38 137.77,26.42 JP2.15
  Bottom 0.254: R15.2 133.1,11.99 133.1,14.22 D15.A
N$16
  Top 0.254: JP2.16 137.57,23.77 136.35,22.55 136.35,7.32 133.3,4.27 D16.A
  Bottom 0.254: R16.2 129.03,3.25 129.84,4.06 133.1,4.06 D16.A
N$17
  Top 0.254: D17.A 124.16,74.17 119.89,69.9 119.89,62.18 JP3.1
  Bottom 0.254: R17.2 124.16,71.93 124.16,74.17 D17.A
N$18
  Bottom 0.254: D18.A 124.16,64.21 124.16,61.98 R18.2 123.95,61.77 121.72,59.54 119.69,59.54 JP3.2
N$19
  Bottom 0.254: R19.2 124.16,52.02 124.16,54.05 D19.A 124.16,54.25 123.34,55.07 121.72,55.07 119.89,56.9 JP3.3
N$20
  Top 0.254: D20.A 124.16,44.3 121.11,47.35 121.11,52.83 119.69,54.25 JP3.4
  Bottom 0.254: R20.2 124.16,42.06 124.16,44.09 D20.A
N$21  (via drill 0.61)
  Top 0.254: v127,35.76 126.59,36.17 v126.59,50.19
  Bottom 0.254: R21.2 124.16,31.9 124.16,34.14 D21.A 124.36,34.34 125.78,35.76 v127,35.76 | v126.59,50.19 126.19,50.6 121.11,50.6 119.89,51.82 JP3.5
N$22  (via drill 0.61)
  Top 0.254: v122.53,43.28 125.98,39.83 125.98,26.01 124.36,24.38 D22.A
  Bottom 0.254: R22.2 124.16,21.95 124.16,24.18 D22.A | v122.53,43.28 121.11,44.7 121.11,49.17 119.69,49.17 JP3.6
N$23
  Top 0.254: D23.A 124.16,14.43 121.51,17.07 121.51,43.48 120.9,44.09 120.9,45.72 119.89,46.74 JP3.7
  Bottom 0.254: R23.2 124.16,11.99 124.16,14.22 D23.A
N$24  (via drill 0.61)
  Top 0.254: v120.5,20.12 120.9,19.71 120.9,7.52 124.16,4.27 D24.A
  Bottom 0.254: R24.2 120.09,3.25 120.9,4.06 124.16,4.06 D24.A | v120.5,20.12 121.11,20.12 121.11,42.67 119.69,44.09 JP3.8
N$25  (via drill 0.61)
  Top 0.254: v118.06,62.79 118.06,71.53 115.42,74.17 D25.A
  Bottom 0.254: R25.2 115.01,71.93 115.01,74.17 115.21,74.17 D25.A | v118.06,62.79 118.06,41.86 119.69,41.86 JP3.9
N$26
  Top 0.254: D26.A 115.42,64.21 118.26,61.37 118.26,40.44 119.48,39.22 JP3.10
  Bottom 0.254: R26.2 115.01,61.98 115.01,64.21 115.21,64.21 D26.A
N$27
  Bottom 0.254: D27.A 115.21,54.05 115.01,54.05 115.01,52.02 R27.2 115.01,51.82 117.04,49.78 117.04,45.31 112.78,45.31 111.96,44.5 111.96,40.23 116.23,40.23 119.69,36.78 JP3.11
N$28
  Top 0.254: D28.A 115.42,44.09 116.23,43.28 116.23,38 119.48,34.75 119.48,34.14 JP3.12
  Bottom 0.254: R28.2 114.81,42.06 114.61,42.27 113.39,42.27 112.57,43.08 112.57,44.3 115.21,44.3 D28.A
N$29
  Bottom 0.254: D29.A 115.21,34.14 115.01,34.14 R29.2 115.01,31.7 119.69,31.7 JP3.13
N$30
  Top 0.254: D30.A 115.42,24.38 119.48,28.45 119.48,28.85 JP3.14
  Bottom 0.254: R30.2 115.01,21.95 115.01,24.18 115.21,24.18 D30.A
N$31
  Top 0.254: D31.A 115.42,14.43 117.04,16.05 117.04,23.77 119.69,26.42 JP3.15
  Bottom 0.254: R31.2 115.01,11.99 115.01,14.22 115.21,14.22 D31.A
N$32
  Top 0.254: JP3.16 119.48,23.77 117.65,21.95 117.65,6.5 115.42,4.27 D32.A
  Bottom 0.254: R32.2 111.15,3.25 111.96,4.06 115.21,4.06 D32.A
N$33
  Top 0.254: D33.A 106.07,74.17 102.01,70.1 102.01,62.18 JP4.1
  Bottom 0.254: R33.2 106.07,71.93 106.07,74.17 D33.A
N$34
  Bottom 0.254: D34.A 106.07,64.21 106.07,61.98 R34.2 105.87,61.77 103.63,59.54 101.6,59.54 JP4.2
N$35
  Bottom 0.254: R35.2 106.07,52.02 106.07,54.05 D35.A 106.07,54.25 103.43,56.9 102.01,56.9 JP4.3
N$36
  Top 0.254: D36.A 106.07,44.3 103.83,46.53 103.83,51.82 101.6,54.05 101.6,54.25 JP4.4
  Bottom 0.254: R36.2 106.07,42.06 106.07,44.09 D36.A
N$37  (via drill 0.61)
  Top 0.254: v109.12,35.76 108.71,36.17 108.71,48.16 v104.24,52.63
  Bottom 0.254: R37.2 106.07,31.9 106.07,34.14 D37.A 106.27,34.34 107.7,35.76 v109.12,35.76 | v104.24,52.63 103.63,52.02 102.01,52.02 JP4.5
N$38
  Top 0.254: D38.A 106.27,24.38 108.1,26.21 108.1,40.23 103.23,45.11 103.23,47.55 101.6,49.17 JP4.6
  Bottom 0.254: R38.2 106.07,21.95 106.07,24.18 D38.A
N$39  (via drill 0.61)
  Top 0.254: v110.13,42.47 110.13,18.29 106.27,14.43 D39.A
  Bottom 0.254: R39.2 106.07,11.99 106.07,14.22 D39.A | v110.13,42.47 106.88,45.72 103.02,45.72 102.01,46.74 JP4.7
N$40
  Top 0.254: JP4.8 101.6,44.09 103.83,41.86 103.83,6.5 106.07,4.27 D40.A
  Bottom 0.254: R40.2 102.01,3.25 102.82,4.06 106.07,4.06 D40.A
N$41  (via drill 0.61)
  Top 0.254: v99.16,43.48 99.16,46.94 98.75,47.35 98.75,49.38 98.96,49.58 98.96,72.54 97.33,74.17 D41.A
  Bottom 0.254: R41.2 97.13,71.93 97.13,74.17 D41.A | v99.16,43.48 100.79,41.86 101.8,41.86 JP4.9
N$42  (via drill 0.61)
  Top 0.254: v95.5,40.64 95.5,62.59 97.13,64.21 D42.A
  Bottom 0.254: R42.2 97.13,61.98 97.13,64.21 D42.A | v95.5,40.64 95.91,40.23 100.38,40.23 101.4,39.22 JP4.10
N$43  (via drill 0.61)
  Top 0.254: v99.77,49.17 100.18,48.77 100.18,38.41 101.8,36.78 JP4.11
  Bottom 0.254: D43.A 97.13,54.05 97.13,52.02 R43.2 97.13,51.82 v99.77,49.17
N$44
  Top 0.254: D44.A 97.33,44.09 98.15,43.28 98.15,38 101.4,34.75 101.4,34.14 JP4.12
  Bottom 0.254: R44.2 97.13,42.06 97.13,44.09 D44.A
N$45
  Bottom 0.254: D45.A 97.13,34.14 97.13,31.9 R45.2 97.13,31.7 101.8,31.7 JP4.13
N$46
  Top 0.254: D46.A 97.33,24.38 101.4,28.45 101.4,28.85 JP4.14
  Bottom 0.254: R46.2 97.13,21.95 97.13,24.18 D46.A
N$47
  Top 0.254: D47.A 97.13,14.43 95.5,16.05 95.5,20.12 101.8,26.42 JP4.15
  Bottom 0.254: R47.2 97.13,11.99 97.13,14.22 D47.A
N$48
  Top 0.254: JP4.16 101.4,23.77 98.96,21.34 98.96,5.89 97.33,4.27 D48.A
  Bottom 0.254: R48.2 93.07,3.25 93.88,4.06 97.13,4.06 D48.A
N$49
  Top 0.254: D49.A 88.19,74.17 83.92,69.9 83.92,62.18 JP5.1
  Bottom 0.254: R49.2 88.19,71.93 88.19,74.17 D49.A
N$50
  Bottom 0.254: D50.A 88.19,64.21 88.19,61.98 R50.2 87.99,61.77 85.75,59.54 83.72,59.54 JP5.2
N$51
  Bottom 0.254: R51.2 88.19,52.02 88.19,54.05 D51.A 88.19,54.25 85.55,56.9 83.92,56.9 JP5.3
N$52
  Top 0.254: D52.A 88.19,44.3 85.14,47.35 85.14,52.83 83.72,54.25 JP5.4
  Bottom 0.254: R52.2 88.19,42.06 88.19,44.09 D52.A
N$53  (via drill 0.61)
  Top 0.254: v91.03,35.76 90.63,36.17 v90.63,50.19
  Bottom 0.254: R53.2 88.19,31.9 88.19,34.14 D53.A 88.39,34.34 89.81,35.76 v91.03,35.76 | v90.63,50.19 90.22,50.6 85.14,50.6 83.92,51.82 JP5.5
N$54
  Bottom 0.254: R54.2 88.19,21.95 88.19,24.18 D54.A 88.19,24.38 85.14,27.43 85.14,49.17 83.72,49.17 JP5.6
N$55
  Top 0.254: D55.A 88.39,14.43 90.02,16.05 90.02,40.23 83.92,46.33 83.92,46.74 JP5.7
  Bottom 0.254: R55.2 88.19,11.99 88.19,14.22 D55.A
N$56
  Top 0.254: JP5.8 83.72,44.09 85.95,41.86 85.95,6.5 88.19,4.27 D56.A
  Bottom 0.254: R56.2 84.12,3.25 84.94,4.06 88.19,4.06 D56.A
N$57  (via drill 0.61)
  Top 0.254: v77.42,45.72 77.42,72.34 79.25,74.17 D57.A
  Bottom 0.254: R57.2 79.05,71.93 79.05,74.17 79.25,74.17 D57.A | v77.42,45.72 77.83,45.31 80.26,45.31 83.72,41.86 JP5.9
N$58  (via drill 0.61)
  Top 0.254: v81.28,41.45 81.28,46.94 80.87,47.35 80.87,49.17 81.08,49.38 81.08,62.59 79.45,64.21 D58.A
  Bottom 0.254: R58.2 79.05,61.98 79.05,64.21 79.25,64.21 D58.A | v81.28,41.45 83.52,39.22 JP5.10
N$59  (via drill 0.61)
  Top 0.254: v81.89,48.97 82.3,48.56 82.3,38.2 83.72,36.78 JP5.11
  Bottom 0.254: D59.A 79.25,54.05 79.05,54.05 79.05,52.02 R59.2 79.05,51.82 v81.89,48.97
N$60
  Bottom 0.254: D60.A 79.25,44.09 79.05,44.09 79.05,42.06 R60.2 79.05,41.86 82.5,38.41 82.5,34.14 83.52,34.14 JP5.12
N$61
  Bottom 0.254: D61.A 79.25,34.14 79.05,34.14 79.05,31.9 R61.2 79.05,31.7 83.72,31.7 JP5.13
N$62
  Top 0.254: D62.A 79.45,24.38 83.52,28.45 83.52,28.85 JP5.14
  Bottom 0.254: R62.2 79.05,21.95 79.05,24.18 79.25,24.18 D62.A
N$63
  Top 0.254: D63.A 79.45,14.43 82.3,17.27 82.3,24.99 83.72,26.42 JP5.15
  Bottom 0.254: R63.2 79.05,11.99 79.05,14.22 D63.A
N$64
  Top 0.254: JP5.16 83.52,23.77 82.91,23.16 82.91,7.72 79.45,4.27 D64.A
  Bottom 0.254: R64.2 75.18,3.25 76,4.06 79.25,4.06 D64.A
N$65
  Top 0.254: D65.A 70.1,74.17 65.84,69.9 65.84,62.18 JP6.1
  Bottom 0.254: R65.2 70.1,71.93 70.1,74.17 D65.A
N$66
  Bottom 0.254: D66.A 70.1,64.21 70.1,61.98 R66.2 69.9,61.77 67.67,59.54 65.63,59.54 JP6.2
N$67
  Top 0.254: D67.A 70.1,54.25 66.85,57.51 65.84,57.51 65.84,57.1 JP6.3
  Bottom 0.254: R67.2 70.1,52.02 70.1,54.05 D67.A
N$68  (via drill 0.61)
  Top 0.254: v73.36,45.72 v73.36,51.61
  Bottom 0.254: 73.36,44.09 70.31,44.09 D68.A | 73.36,44.09 73.56,44.09 73.56,42.67 72.75,41.86 70.1,41.86 R68.2 | 73.36,44.09 v73.36,45.72 | v73.36,51.61 73.36,55.27 66.45,55.27 65.63,54.46 JP6.4
N$69  (via drill 0.61)
  Top 0.254: v74.57,35.76 74.37,35.97 v74.37,50.19
  Bottom 0.254: R69.2 70.1,31.9 70.1,34.14 D69.A 70.31,34.34 71.73,35.76 v74.57,35.76 | v74.37,50.19 73.97,50.6 67.06,50.6 65.84,51.82 JP6.5
N$70  (via drill 0.61)
  Top 0.254: v73.56,25.81 73.56,44.3 71.93,45.92 v71.93,47.75
  Bottom 0.254: R70.2 70.1,21.95 70.1,24.18 D70.A 70.31,24.38 71.73,25.81 v73.56,25.81 | v71.93,47.75 71.73,47.95 66.85,47.95 65.63,49.17 JP6.6
N$71  (via drill 0.61)
  Top 0.254: v72.54,42.88 72.54,16.66 70.31,14.43 D71.A
  Bottom 0.254: R71.2 70.1,11.99 70.1,14.22 D71.A | v72.54,42.88 72.34,43.08 69.29,43.08 65.63,46.74 JP6.7
N$72  (via drill 0.61)
  Top 0.254: v67.46,42.27 67.87,41.86 67.87,6.5 70.1,4.27 D72.A
  Bottom 0.254: R72.2 66.04,3.25 66.85,4.06 70.1,4.06 D72.A | v67.46,42.27 65.63,44.09 JP6.8
N$73
  Top 0.254: D73.A 61.37,74.37 68.48,74.37 68.48,74.57 69.29,75.39 72.54,75.39 72.54,52.02 67.26,46.74 67.26,43.28 65.84,41.86 JP6.9
  Bottom 0.254: R73.2 61.16,71.93 61.16,74.17 D73.A
N$74
  Bottom 0.254: D74.A 61.16,64.21 61.16,61.98 R74.2 61.16,61.77 64.21,58.73 64.21,39.22 65.43,39.22 JP6.10
N$75
  Top 0.254: D75.A 61.37,54.05 64.21,51.21 64.21,38.2 65.63,36.78 JP6.11
  Bottom 0.254: R75.2 61.16,52.02 61.16,54.05 D75.A
N$76
  Bottom 0.254: D76.A 61.16,44.09 61.16,42.06 R76.2 61.16,41.86 63.6,39.42 63.6,34.14 65.43,34.14 JP6.12
N$77
  Bottom 0.254: D77.A 61.16,34.14 61.16,31.9 R77.2 61.16,31.7 65.63,31.7 JP6.13
N$78
  Top 0.254: D78.A 61.37,24.38 65.43,28.45 65.43,28.85 JP6.14
  Bottom 0.254: R78.2 61.16,21.95 61.16,24.18 D78.A
N$79
  Top 0.254: D79.A 61.37,14.43 64.21,17.27 64.21,24.99 65.63,26.42 JP6.15
  Bottom 0.254: R79.2 61.16,11.99 61.16,14.22 D79.A
N$80
  Top 0.254: JP6.16 65.43,23.77 64.82,23.16 64.82,7.72 61.37,4.27 D80.A
  Bottom 0.254: R80.2 57.1,3.25 57.91,4.06 61.16,4.06 D80.A
N$81
  Top 0.254: D81.A 52.22,74.17 47.95,69.9 47.95,62.18 JP7.1
  Bottom 0.254: R81.2 52.02,71.93 52.02,74.17 52.22,74.17 D81.A
N$82
  Bottom 0.254: D82.A 52.22,64.21 52.02,64.21 52.02,61.98 R82.2 51.82,61.77 49.58,59.54 47.75,59.54 JP7.2
N$83
  Bottom 0.254: 52.02,54.05 52.02,52.02 R83.2 | 52.02,54.05 52.22,54.05 D83.A 52.02,54.05 | 52.02,54.05 49.17,56.9 47.95,56.9 JP7.3
N$84
  Top 0.254: D84.A 52.22,44.3 49.17,47.35 49.17,52.83 47.75,54.25 JP7.4
  Bottom 0.254: R84.2 52.02,42.06 52.02,44.09 52.22,44.09 D84.A
N$85
  Bottom 0.254: R85.2 52.02,31.9 52.02,34.14 52.22,34.14 D85.A 52.22,34.34 49.78,36.78 49.78,51.82 47.95,51.82 JP7.5
N$86
  Bottom 0.254: R86.2 52.02,21.95 52.02,24.18 52.22,24.18 D86.A 52.22,24.38 49.17,27.43 49.17,49.17 47.75,49.17 JP7.6
N$87
  Top 0.254: D87.A 52.43,14.43 54.05,16.05 54.05,20.32 49.17,25.2 49.17,43.89 48.97,44.09 48.97,45.72 47.95,46.74 JP7.7
  Bottom 0.254: R87.2 52.02,11.99 52.02,14.22 52.22,14.22 D87.A
N$88  (via drill 0.61)
  Top 0.254: v46.53,37.8 46.13,38.2 46.13,42.67 47.55,44.09 JP7.8 | v47.35,20.12 50.6,16.87 50.6,5.89 52.22,4.27 D88.A
  Bottom 0.254: R88.2 48.16,3.25 48.97,4.06 52.22,4.06 D88.A | v46.53,37.8 44.09,35.36 42.27,35.36 41.45,34.54 41.45,30.28 44.09,30.28 46.13,28.25 46.13,20.12 v47.35,20.12
N$89  (via drill 0.61)
  Top 0.254: v45.31,46.33 45.31,72.14 43.28,74.17 D89.A
  Bottom 0.254: R89.2 43.08,71.93 43.08,74.17 D89.A | v45.31,46.33 45.31,41.86 47.75,41.86 JP7.9
N$90
  Bottom 0.254: D90.A 43.08,64.21 43.08,61.98 R90.2 43.08,61.77 45.52,59.33 45.52,47.95 33.33,47.95 32.51,47.14 32.51,40.23 46.53,40.23 47.55,39.22 JP7.10
N$91
  Top 0.254: D91.A 43.08,54.05 41.45,52.43 41.45,46.33 42.47,45.31 45.52,45.31 45.52,37.59 46.33,36.78 47.75,36.78 JP7.11
  Bottom 0.254: R91.2 43.08,52.02 43.08,54.05 D91.A
N$92
  Top 0.254: D92.A 43.28,44.09 44.91,42.47 44.91,36.78 47.55,34.14 JP7.12
  Bottom 0.254: R92.2 43.08,42.06 43.08,44.09 D92.A
N$93
  Bottom 0.254: D93.A 43.08,34.14 43.08,31.9 R93.2 43.08,31.7 47.75,31.7 JP7.13
N$94
  Top 0.254: D94.A 43.28,24.38 47.55,28.65 47.55,28.85 JP7.14
  Bottom 0.254: R94.2 43.08,21.95 43.08,24.18 D94.A
N$95
  Top 0.254: D95.A 43.28,14.43 45.72,16.87 45.72,24.38 47.75,26.42 JP7.15
  Bottom 0.254: R95.2 43.08,11.99 43.08,14.22 D95.A
N$96
  Top 0.254: JP7.16 47.55,23.77 46.33,22.55 46.33,7.32 43.28,4.27 D96.A
  Bottom 0.254: R96.2 39.01,3.25 39.83,4.06 43.08,4.06 D96.A
N$97
  Top 0.254: D97.A 34.14,74.17 29.87,69.9 29.87,62.18 JP8.1
  Bottom 0.254: R97.2 34.14,71.93 34.14,74.17 D97.A
N$98
  Bottom 0.254: D98.A 34.14,64.21 34.14,61.98 R98.2 33.93,61.77 31.7,59.54 29.67,59.54 JP8.2
N$99
  Bottom 0.254: R99.2 34.14,52.02 34.14,54.05 D99.A 34.14,54.25 31.5,56.9 29.87,56.9 JP8.3
N$100
  Top 0.254: D100.A 34.14,44.3 31.9,46.53 31.9,52.02 29.67,54.25 JP8.4
  Bottom 0.254: R100.2 34.14,42.06 34.14,44.09 D100.A
N$101  (via drill 0.61)
  Top 0.254: v38.2,35.76 37.8,36.17 v37.8,50.19
  Bottom 0.254: R101.2 34.14,31.9 34.14,34.14 D101.A 34.34,34.34 35.76,35.76 v38.2,35.76 | v37.8,50.19 37.39,50.6 31.09,50.6 29.87,51.82 JP8.5
N$102  (via drill 0.61)
  Top 0.254: v37.59,25.81 37.19,26.21 37.19,39.22 31.29,45.11 31.29,47.55 29.67,49.17 JP8.6
  Bottom 0.254: R102.2 34.14,21.95 34.14,24.18 D102.A 34.34,24.38 35.76,25.81 v37.59,25.81
N$103
  Top 0.254: D103.A 34.34,14.43 36.58,16.66 36.58,39.01 29.87,45.72 29.87,46.74 JP8.7
  Bottom 0.254: R103.2 34.14,11.99 34.14,14.22 D103.A
N$104
  Top 0.254: JP8.8 29.67,44.09 32.51,41.25 32.51,5.89 34.14,4.27 D104.A
  Bottom 0.254: R104.2 30.07,3.25 30.89,4.06 34.14,4.06 D104.A
N$105
  Top 0.254: D105.A 25.4,74.17 28.25,71.32 28.25,43.28 29.67,41.86 JP8.9
  Bottom 0.254: R105.2 25.2,71.93 25.2,74.17 D105.A
N$106
  Bottom 0.254: D106.A 25.2,64.21 25.2,61.98 R106.2 25.2,61.77 28.25,58.73 28.25,39.22 29.46,39.22 JP8.10
N$107
  Bottom 0.254: D107.A 25.2,54.05 25.2,52.02 R107.2 25.2,51.82 27.64,49.38 27.64,36.78 29.67,36.78 JP8.11
N$108
  Top 0.254: D108.A 25.4,44.09 28.25,41.25 28.25,35.36 29.46,34.14 JP8.12
  Bottom 0.254: R108.2 25.2,42.06 25.2,44.09 D108.A
N$109
  Bottom 0.254: D109.A 25.2,34.14 25.2,31.9 R109.2 25.2,31.7 29.67,31.7 JP8.13
N$110
  Top 0.254: D110.A 25.4,24.38 29.46,28.45 29.46,28.85 JP8.14
  Bottom 0.254: R110.2 25.2,21.95 25.2,24.18 D110.A
N$111
  Top 0.254: D111.A 25.4,14.43 27.84,16.87 27.84,24.59 29.67,26.42 JP8.15
  Bottom 0.254: R111.2 25.2,11.99 25.2,14.22 D111.A
N$112
  Top 0.254: JP8.16 29.46,23.77 28.45,22.76 28.45,7.32 25.4,4.27 D112.A
  Bottom 0.254: R112.2 21.13,3.25 21.95,4.06 25.2,4.06 D112.A
N$113
  Top 0.254: D113.A 16.05,74.17 11.99,70.1 11.99,62.18 JP9.1
  Bottom 0.254: R113.2 16.05,71.93 16.05,74.17 D113.A
N$114
  Bottom 0.254: D114.A 16.05,64.21 16.05,61.98 R114.2 15.85,61.77 13.61,59.54 11.58,59.54 JP9.2
N$115
  Bottom 0.254: R115.2 16.05,52.02 16.05,54.05 D115.A 16.05,54.25 13.41,56.9 11.99,56.9 JP9.3
N$116
  Top 0.254: D116.A 16.05,44.3 13.82,46.53 13.82,51.82 11.58,54.05 11.58,54.25 JP9.4
  Bottom 0.254: R116.2 16.05,42.06 16.05,44.09 D116.A
N$117  (via drill 0.61)
  Top 0.254: v19.1,35.76 18.69,36.17 18.69,48.16 v14.22,52.63
  Bottom 0.254: R117.2 16.05,31.9 16.05,34.14 D117.A 16.26,34.34 17.68,35.76 v19.1,35.76 | v14.22,52.63 13.61,52.02 11.99,52.02 JP9.5
N$118
  Top 0.254: D118.A 16.26,24.38 18.09,26.21 18.09,40.23 13.21,45.11 13.21,47.55 11.58,49.17 JP9.6
  Bottom 0.254: R118.2 16.05,21.95 16.05,24.18 D118.A
N$119  (via drill 0.61)
  Top 0.254: v10.57,15.85 10.16,16.26 10.16,45.11 11.79,46.74 JP9.7
  Bottom 0.254: R119.2 16.05,11.99 16.05,14.22 D119.A 14.63,15.85 v10.57,15.85
N$120
  Top 0.254: JP9.8 11.58,44.09 14.43,41.25 14.43,5.89 16.05,4.27 D120.A
  Bottom 0.254: R120.2 12.19,3.25 13.01,4.06 16.05,4.06 D120.A
N$121
  Bottom 0.254: D121.A 7.11,74.17 7.11,71.93 R121.2 6.91,71.73 4.88,69.7 4.88,45.31 8.33,45.31 11.79,41.86 JP9.9
N$122  (via drill 0.61)
  Top 0.254: v4.47,42.06 4.47,61.57 7.11,64.21 D122.A
  Bottom 0.254: R122.2 7.11,61.98 7.11,64.21 D122.A | v4.47,42.06 6.3,40.23 10.36,40.23 11.38,39.22 JP9.10
N$123  (via drill 0.61)
  Top 0.254: v5.49,37.8 5.49,52.43 7.11,54.05 D123.A
  Bottom 0.254: R123.2 7.11,52.02 7.11,54.05 D123.A | v5.49,37.8 10.77,37.8 11.79,36.78 JP9.11
N$124  (via drill 0.61)
  Top 0.254: v9.14,35.97 9.14,36.98 7.72,38.41 7.72,43.69 7.32,44.09 D124.A
  Bottom 0.254: R124.2 7.11,42.06 7.11,44.09 D124.A | v9.14,35.97 10.97,34.14 11.38,34.14 JP9.12
N$125
  Bottom 0.254: D125.A 7.11,34.14 7.11,31.9 R125.2 7.11,31.7 11.79,31.7 JP9.13
N$126
  Bottom 0.254: R126.2 7.11,21.95 7.11,24.18 D126.A 7.32,24.38 11.38,28.45 11.38,28.85 JP9.14
N$127  (via drill 0.61)
  Top 0.254: v9.14,24.99 9.14,16.26 7.32,14.43 D127.A
  Bottom 0.254: R127.2 7.11,11.99 7.11,14.22 D127.A | v9.14,24.99 10.57,26.42 11.79,26.42 JP9.15
N$128
  Top 0.254: JP9.16 11.58,23.77 11.58,8.53 7.32,4.27 D128.A
  Bottom 0.254: R128.2 3.05,3.25 3.86,4.06 7.11,4.06 D128.A

## Text on the board
tPlace: 121 | 113 | 105 | 97 | 89 | 81 | 73 | 65 | 57 | 49 | 41 | 33 | 25 | 17 | 9 | 1 | OptoSensor_Rev_17 | 122 | 114 | 106 | 98 | 90 | 82 | 74 | 66 | 58 | 50 | 42 | 34 | 26 | 18 | 10 | 2 | 123 | 115 | 107 | 99 | 91 | 83 | 75 | 67 | 59 | 51 | 43 | 35 | 27 | 19 | 11 | 3 | 124 | 116 | 108 | 100 | 92 | 84 | 76 | 68 | 60 | 52 | 44 | 36 | 28 | 20 | 12 | 4 | 125 | 117 | 109 | 101 | 93 | 85 | 77 | 69 | 61 | 53 | 45 | 37 | 29 | 21 | 13 | 5 | 126 | 118 | 110 | 102 | 94 | 86 | 78 | 70 | 62 | 54 | 46 | 38 | 30 | 22 | 14 | 6 | 127 | 119 | 111 | 103 | 95 | 87 | 79 | 71 | 63 | 55 | 47 | 39 | 31 | 23 | 15 | 7 | Nov 9, 2009 | 128 | 120 | 112 | 104 | 96 | 88 | 80 | 72 | 64 | 56 | 48 | 40 | 32 | 24 | 16 | 8